# Altium PCB Detector.PcbDoc
Units mil, origin at the board's own origin, x right, y up, seen from the top; angles counter-clockwise.
Board outline 1400 x 900 mil, 2 copper layers (Top Layer, Bottom Layer), stack 62.209 mil thick; 35 components, 18 nets, 101 pads, 26 vias.
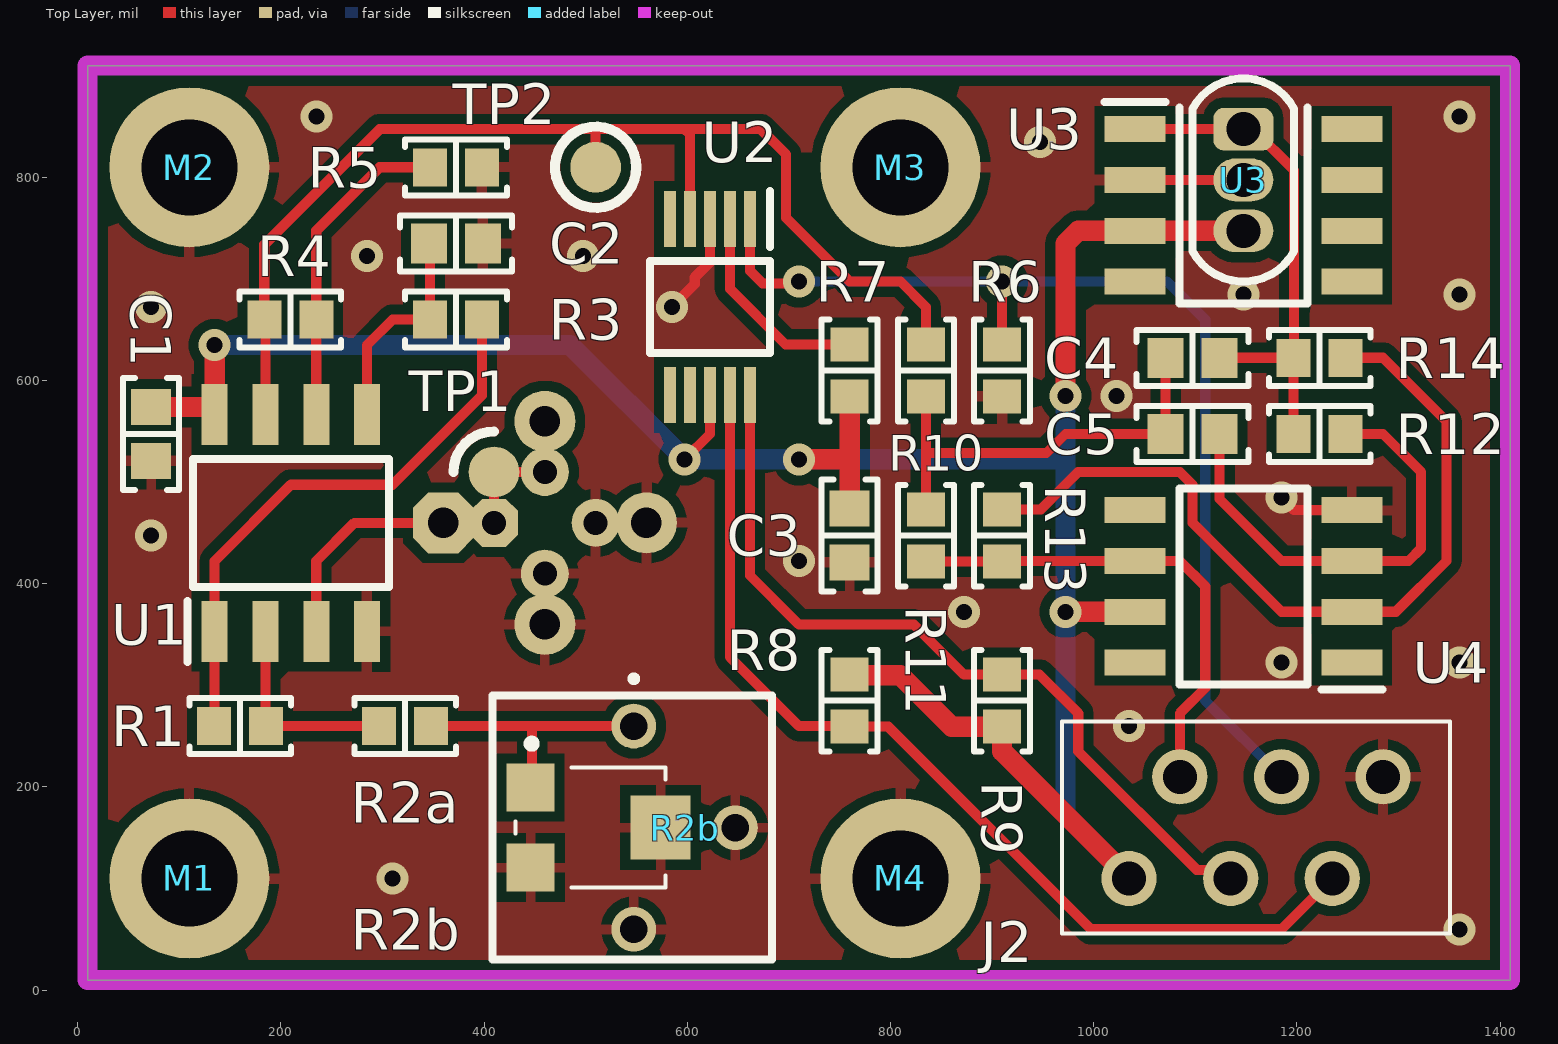
[diagram p0: Top Layer view]
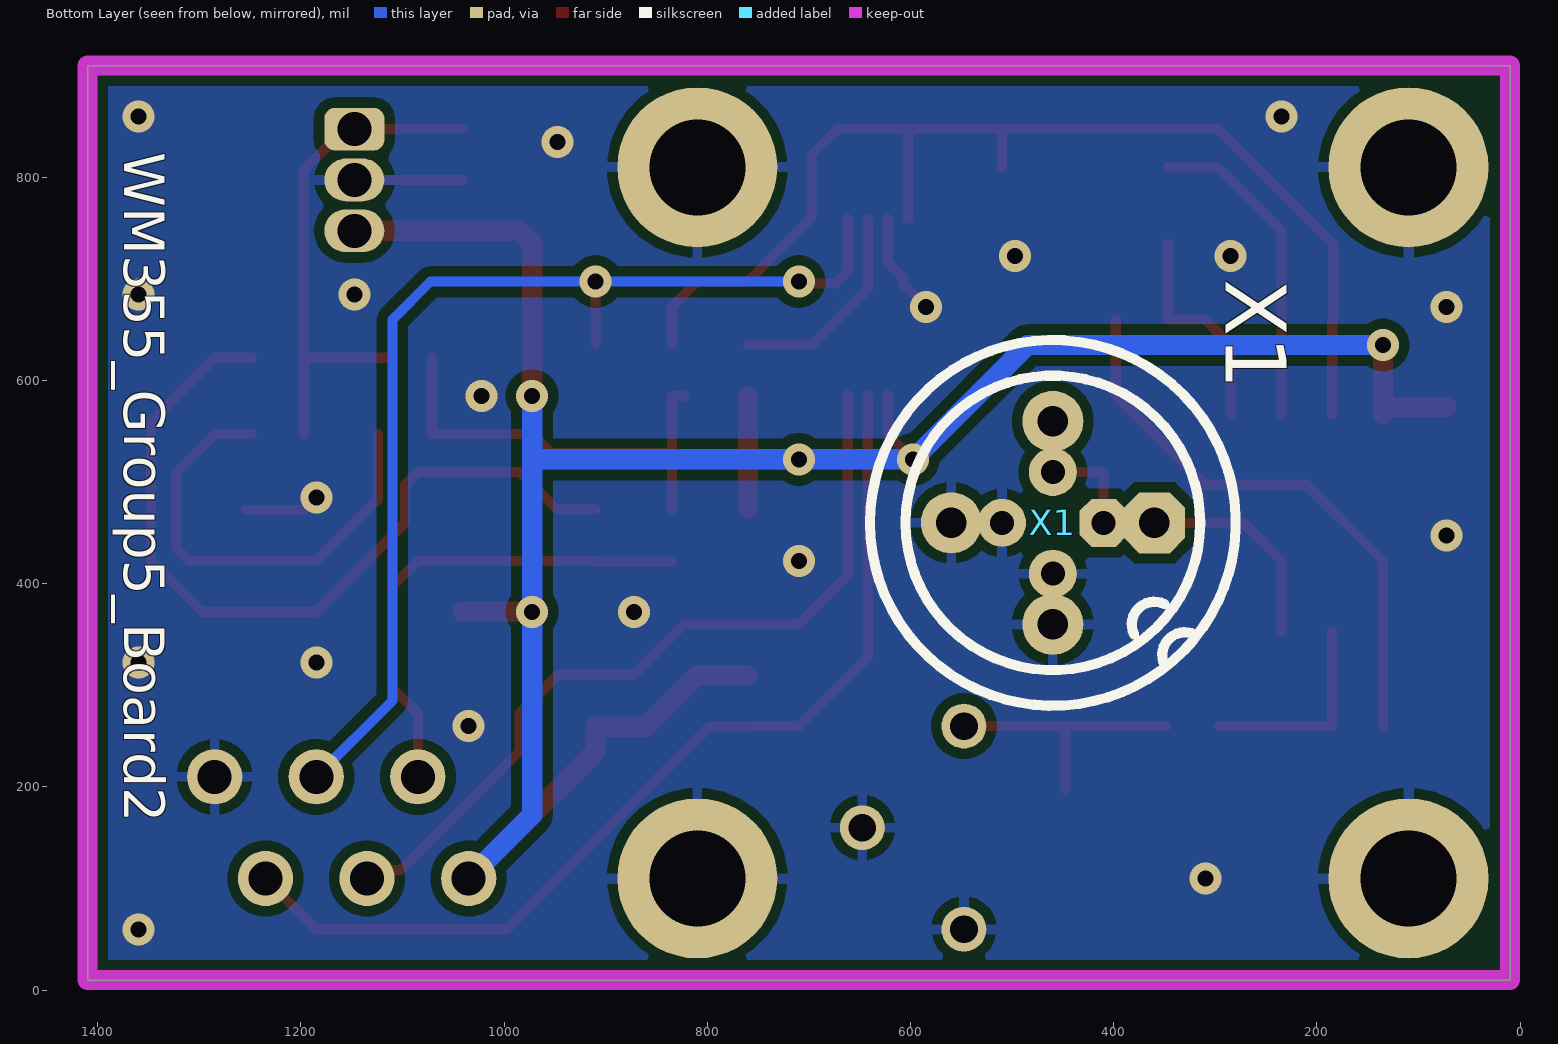
[diagram p1: Bottom Layer view, seen from below]
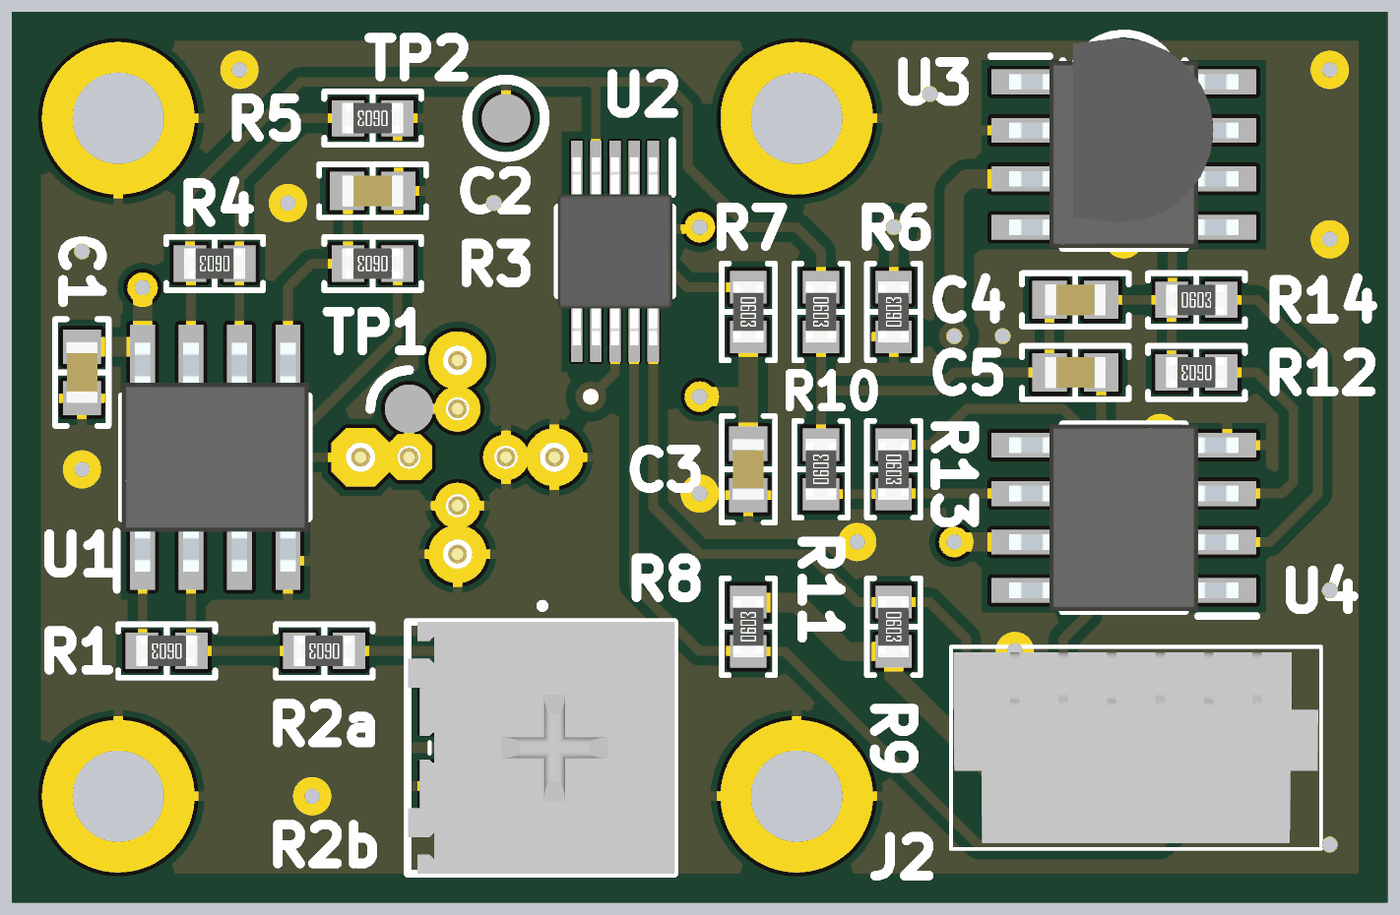
[diagram p2: 3D render of the assembled board from above, using the file's embedded part models]

## Layer stack, top to bottom
Top Solder: solder mask 0.4, Solder Resist, Dk 3.5
Top Layer: signal copper 1.4
Dielectric 1: dielectric 59.4094, FR-4, Dk 4.8
Bottom Layer: signal copper 1.4
Bottom Solder: solder mask 0.4, Solder Resist, Dk 3.5

## Board outline
1409.84,909.84 9.84,909.84 9.84,9.84 1409.84,9.84

## Design rules (kind name [scope] priority, off if disabled: settings)
Clearance [All] p1: gap=10 ignorepadtopadclearanceinfootprint=TRUE except(0: Arc-Hole Track-Hole SMDPad-Hole THPad-Hole Via-Hole Fill-Hole Poly-Hole Region-Hole Text-Hole; 5: Arc-Arc Arc-Track Arc-SMDPad Track-Track Track-SMDPad)
MinimumSolderMaskSliver [All] p1: minsoldermaskwidth=2.5
PolygonConnect [IsVia AND InNet('GND')] p1: connectstyle=Direct reliefconductorwidth=10 reliefentries=4 polygonreliefangle="90 Angle" airgapwidth=10
PolygonConnect PolygonConnect_1 [All] p2: connectstyle=Relief reliefconductorwidth=10 reliefentries=4 polygonreliefangle="90 Angle" airgapwidth=10
RoutingVias [All] p1: holewidth=28 width=50 viastyle="Through Hole" minholewidth=28 minwidth=50 maxholewidth=28 maxwidth=50
SilkToSilkClearance [All] p1: silktosilkclearance=2.5
SilkToSolderMaskClearance [IsPad] p1: minsilkscreentomaskgap=2.5 clearancetoexposedcopper=TRUE
SolderMaskExpansion [All] p1: expansion=4 istentingtop=FALSE
Width [All] p1: maxlimit=50 minlimit=10 preferedwidth=10 minimp=50.000000 maximp=50.000000 favimp=50.000000
27 further rules are at their usual default settings.

## Classes and differential pairs
component class Detector: C1 C2 C3 C4 C5 J2 M1 M2 M3 M4 R1 R2a R2b R3 R4 R5 R6 R7 R8 R9 R10 R11 R13 R14 TP1 TP2 U1 U2 U3 U4 X1

## Components (designator, comment, footprint, x,y, rotation, side; value= is the part's Value field where it differs from the comment)
C1 "100nF" "CAP 0603_1608" 72.34,547.34 r90 top
C2 "1µF" "CAP 0603_1608" 372.34,734.84 r180 top
C3 "1µF" "CAP 0603_1608" 759.84,447.34 r90 top
C4 "1µF" "CAP 0603_1608" 1097.34,622.34 r180 top
C5 "1µF" "CAP 0603_1608" 1097.34,547.34 r180 top
J2 "7-215460-6" 72154606 1159.84,159.84 r0 top
M1 "PTH" M2-PTH 109.84,109.84 r180 top
M2 "PTH" M2-PTH 109.84,809.84 r180 top
M3 "PTH" M2-PTH 809.84,809.84 r180 top
M4 "PTH" M2-PTH 809.84,109.84 r180 top
R1 "4.99kΩ" "RES 0603_1608" 159.84,259.84 r180 top
R2a "1kΩ" "RES 0603_1608" 322.34,259.84 r180 top
R2b "3362P-1-103LFTC33X-1-103E" 3362P_1 408.37,159.84 r270 top
R2b "TC33X-1-103E" TC33X2201E 509.84,159.84 r270 top
R3 "2.2kΩ" "RES 0603_1608" 372.34,659.84 r180 top
R4 "4.99kΩ" "RES 0603_1608" 209.25,659.84 r180 top
R5 "3kΩ" "RES 0603_1608" 372.34,809.84 r180 top
R6 "10kΩ" "RES 0603_1608" 909.84,609.84 r90 top
R7 "10kΩ" "RES 0603_1608" 759.84,609.84 r270 top
R8 "10kΩ" "RES 0603_1608" 759.84,284.84 r90 top
R9 "10kΩ" "RES 0603_1608" 909.84,284.84 r270 top
R10 "16kΩ" "RES 0603_1608" 834.84,609.84 r270 top
R11 "16kΩ" "RES 0603_1608" 834.84,447.34 r90 top
R12 "32.4kΩ" "RES 0603_1608" 1222.34,547.34 r180 top
R13 "4.99kΩ" "RES 0603_1608" 909.84,447.34 r270 top
R14 "10kΩ" "RES 0603_1608" 1222.34,622.34 r0 top
TP1 "Signal In" TP-SMD-50mil 409.84,509.84 r270 top
TP2 "Signal Out" TP-SMD-50mil 509.84,809.84 r270 top
U1 "AD8629ARZ" SOIC127P600X175-8N 209.84,459.84 r90 top
U2 "ADS1114BQDGSRQ1" SOP50P490X110-10N 622.34,672.34 r270 top
U3 "TLE2426CLP" TO-92 1147.34,847.34 r270 top
U3 "TLE2425CD" SOIC127P600X175-8N 1147.34,772.34 r0 top
U4 "AD8628ARZ" SOIC127P600X175-8N 1147.34,397.34 r180 top
X1 "TF-184" TF-184 459.84,459.84 r270 bottom
X1 "TF-54" TF-54 459.84,459.84 r270 bottom

## Footprints (in the part's own frame and the unit in brackets; to place one, negate y for a bottom-side part, rotate by r counter-clockwise, add the part's x,y. Pads: shape width x height; smd on the part's side, far side on the other; paste and mask are expansions set on the pad)
3362P_1 [mm]
  round 1.12 hole 0.69: 1(-2.54,3.53) 2(0,6.07) 3(2.54,3.53)
  silkscreen extent -3.78,0 3.3,6.99, body extent -3.3,0.01 3.3,7, height 4.65
72154606 [mm]
  round 1.381 hole 0.85: 1(-3.175,-1.27) 2(-1.905,1.27) 3(-0.635,-1.27) 4(0.635,1.27) 5(1.905,-1.27) 6(3.175,1.27)
  silkscreen extent -4.85,-2.65 4.85,2.65, body extent -4.77,-2.5 4.77,2.5, height 5.7
"CAP 0603_1608" [mm] "Chip Capacitor, 2-Leads, Body 1.60x0.80mm, IPC Medium Density"
  rect 0.9x1 smd: 1(-0.675,0) 2(0.675,0)
  silkscreen extent -1.4,-0.7 1.4,0.7, body extent -0.8,-0.41 0.8,0.41, height 0.82
M2-PTH [mm] "M2 Mounting Hole (Plated, Exposed Pad)"
  round 4 hole 2.4: 1(0,0)
"RES 0603_1608" [mm] "Chip Resistor, 2-Leads, Body 1.60x0.80mm, IPC Medium Density"
  rect 0.85x0.95 smd: 1(-0.65,0) 2(0.65,0)
  silkscreen extent -1.27,-0.7 1.27,0.7, body extent -0.8,-0.4 0.8,0.4, height 0.45
SOIC127P600X175-8N [mm]
  rect 1.525x0.65 smd: 1(-2.712,1.905) 2(-2.712,0.635) 3(-2.712,-0.635) 4(-2.712,-1.905) 5(2.712,-1.905) 6(2.712,-0.635) 7(2.712,0.635) 8(2.712,1.905)
  silkscreen extent -3.47,-2.45 1.6,2.58, body extent -3,-2.45 3,2.45, height 1.75
SOP50P490X110-10N [mm]
  rect 1.4x0.3 smd mask+0.05: 1(-2.2,1) 2(-2.2,0.5) 3(-2.2,0) 4(-2.2,-0.5) 5(-2.2,-1) 6(2.2,-1) 7(2.2,-0.5) 8(2.2,0) 9(2.2,0.5) 10(2.2,1)
  silkscreen extent -2.9,-1.5 1.15,1.5, body extent -2.46,-1.5 2.46,1.5, height 1.1
TC33X2201E [mm]
  rect 1.2x1.2 smd: 1(-1,-1.625) 3(1,-1.625)
  rect 1.6x1.5 smd: 2(0,1.625)
  silkscreen extent -2.2,-2 1.5,1.75, body extent -1.5,-1.9 1.5,1.9, height 1.2
TF-54 [mil] "TF-54 IC socket from Fischer Elektronik"
  oct 60x60 hole 30: 1(0,100)
  round 60 hole 30: 2(100,0) 3(0,-100) 4(-100,0)
  silkscreen extent -180,-180 180,180, body extent -203,-203 203,203, height 295
TF-184 [mm] "TF-184 IC socket from Fischer Elektronik"
  oct 1.2x1.2 hole 0.6: 1(0,1.27)
  round 1.2 hole 0.6: 2(1.27,0) 3(0,-1.27) 4(-1.27,0)
  silkscreen extent -3.68,-3.68 3.68,3.68, body extent -3.65,-3.65 3.65,3.65, height 7.5
TO-92 [mm]
  rrect50% 1.07x1.5 hole 0.85 mask+0.05: 1(0,0)
  oval 1.07x1.5 hole 0.85 mask+0.05: 2(1.27,0) 3(2.54,0)
  silkscreen extent -1.27,-1.27 3.81,1.27, body extent -1.14,-1.34 3.68,2.34, height 6.41
TP-SMD-50mil [mil] "50 mil diameter SMD test point"
  round 50 smd: 1(0,0)
  silkscreen extent -40,-40 0,0

## Part data
C1 C2 C3 C4 C5: library part Capacitor, "SMT Capacitor"
J2: "Micro-Match Connector Female 6-Way", Manufacturer_Name="TE Connectivity", Mouser Part Number=571-7-215460-6, Arrow Part Number=7-215460-6, Arrow Price/Stock=https://www.arrow.com/en/products/7-215460-6/te-connectivity, Datasheet Link=https://www.te.com/commerce/DocumentDelivery/DDEController?Action=srchrtrv&DocNm=4-1773457-1_050_Micro_MaTch&DocType=Data+Sheet&DocLang=English&PartCntxt=7-215460-6&DocFormat=pdf, Height=6mm, Manufacturer_Part_Number=7-215460-6, Mouser Price/Stock=https://www.mouser.co.uk/ProductDetail/TE-Connectivity/7-215460-6/?qs=XAKIUOoRPe4W4KMZv%2FpWzg%3D%3D, System=Connector
M1 M2 M3 M4: "Mounting Hole (Plated, Exposed Pad)"
R1 R2a R3 R4 R5 R6 R7 R8 R9 R10 R11 R12 R13 R14: library part Resistor, "SMT Resistor"
R2b: library part 3362P-1-103LF, "TH Trim Potentiometer"
R2b: "SMD Trim Potentiometer", Manufacturer_Name=Bourns, Mouser Part Number=652-TC33X-1-103E, Arrow Part Number=TC33X-1-103E, Arrow Price/Stock=https://www.arrow.com/en/products/tc33x-1-103e/bourns?region=nac, Datasheet Link=https://www.bourns.com/pdfs/TC33.pdf, Manufacturer_Part_Number=TC33X-1-103E, Mouser Price/Stock=https://www.mouser.co.uk/ProductDetail/Bourns/TC33X-1-103E?qs=4vvWAaIu%2Fq5rtw%252Bjip48Mw%3D%3D
TP1 TP2: library part "Test Point"
U1: "Zero-Drift Rail-to-Rail Op-Amp (Dual)", Manufacturer_Name="Analog Devices", Mouser Part Number=584-AD8629ARZ, Arrow Part Number=AD8629ARZ, Arrow Price/Stock=https://www.arrow.com/en/products/ad8629arz/analog-devices?region=nac, Datasheet Link=http://componentsearchengine.com/Datasheets/1/AD8629ARZ.pdf, Height=1.75mm, Manufacturer_Part_Number=AD8629ARZ, Mouser Price/Stock=https://www.mouser.co.uk/ProductDetail/Analog-Devices/AD8629ARZ?qs=%2FtpEQrCGXCz303nvavA3PQ%3D%3D
U2: "I2C 16-Bit ADC", Manufacturer_Name="Texas Instruments", Mouser Part Number=595-ADS1114BQDGSRQ1, Arrow Part Number=ADS1114BQDGSRQ1, Arrow Price/Stock=https://www.arrow.com/en/products/ads1114bqdgsrq1/texas-instruments?region=nac, Datasheet Link=http://www.ti.com/lit/gpn/ads1114-q1, Height=1.1mm, Manufacturer_Part_Number=ADS1114BQDGSRQ1, Mouser Price/Stock=https://www.mouser.co.uk/ProductDetail/Texas-Instruments/ADS1114BQDGSRQ1?qs=34RfhUjJmKcBhGeHOMIUqQ%3D%3D
U3: "Virtual Ground Reference"
U3: "Virtual Ground Reference", Manufacturer_Name="Texas Instruments", Mouser Part Number=595-TLE2425CD, Arrow Part Number=TLE2425CD, Arrow Price/Stock=https://www.arrow.com/en/products/tle2425cd/texas-instruments, Datasheet Link=http://www.ti.com/lit/ds/symlink/tle2425.pdf, Height=1.75mm, Manufacturer_Part_Number=TLE2425CD, Mouser Price/Stock=https://www.mouser.co.uk/ProductDetail/Texas-Instruments/TLE2425CD?qs=5BZzbFV4k2uGRCYCE5HEfQ%3D%3D
U4: "Zero-Drift Rail-to-Rail Op-Amp", Manufacturer_Name="Analog Devices", Mouser Part Number=584-AD8628ARZ, Arrow Part Number=AD8628ARZ, Arrow Price/Stock=https://www.arrow.com/en/products/ad8628arz/analog-devices?region=nac, Datasheet Link=https://www.mouser.in/datasheet/2/609/AD8628_8629_8630-1502219.pdf, Height=1.75mm, Manufacturer_Part_Number=AD8628ARZ, Mouser Price/Stock=https://www.mouser.co.uk/ProductDetail/Analog-Devices/AD8628ARZ?qs=%2FtpEQrCGXCxYn1FPBdRPTA%3D%3D
X1: "TF-184 Socket from Fischer Elektronik"
X1: "TF-54 Socket from Fischer Elektronik"

## Via types
v1: diameter 31.5, hole 15.75, Top Layer to Bottom Layer, 17 vias
v2: diameter 31.5, hole 15.75, Top Layer to Bottom Layer, tented top, 8 vias
v3: diameter 31.5, hole 15.75, Top Layer to Bottom Layer, tented bottom, 1 vias

## Nets (pads, with @x,y where several pads share a name; then routed paths per layer and width w, separated by ;. In a path a pad name is that pad's centre, name@x,y a point inside that pad or via, vN(x,y) a via of type N, cw(c..) or ccw(c..) an arc to the next point about the centre after c; other vN are vias at no path point)
ADDR: J2.4 R6.2 U2.1 | length 1063.5
  Top Layer w10: U2.1 661.71,707.97 674.09,695.59 708.09,695.59 v1(709.84,697.34) ; R6.2 v2(909.84,697.34)
  Bottom Layer w10: v1(709.84,697.34) v2(909.84,697.34) 1072.34,697.34 1109.84,659.84 1109.84,284.84 J2.4
AIN: R4.2 R10.1 TP2.1 U1.7 U2.4 | length 1139.9
  Top Layer w10: U1.7 184.84,658.66 R4.2 183.66,733.66 297.34,847.34 509.84,847.34 ; TP2.1 509.84,847.34 ; U2.4 602.66,842.03 597.34,847.34 ; R10.1 834.84,672.34 809.84,697.34 759.84,697.34 697.34,759.84 697.34,822.34 672.34,847.34 597.34,847.34 ; 509.84,847.34 597.34,847.34
BP_Out: J2.2 R11.1 R13.2 U4.6 | length 483.5
  Top Layer w10: R11.1 R13.2 910.43,422.34 U4.6 1084.84,422.34 1109.84,397.34 1109.84,297.34 1084.84,272.34 J2.2
GND: C1.1 C2.1 C3.1 J2.6 M1.1 M2.1 M3.1 M4.1 R2b.2 R2b.3 R5.1 R6.1 U1.4 U2.3 U3.2 U4.4 X1.2 X1.3 | length 333.4
  Top Layer w10: X1.2@459.84,359.84 X1.2@459.84,409.84 ; v1(584.84,672.34) 607.4,694.9 607.4,701.46 622.34,716.4 U2.3 ; U3.2@1040.57,797.34 U3.2@1147.34,797.34 ; v1(1184.84,484.84) 1197.34,472.34 U4.4
  other v1: 309.84,109.84 1034.84,259.84 1184.84,322.34 872.34,372.34 709.84,422.34 72.34,447.34 1147.34,684.84 1359.84,684.84 284.84,722.34 234.84,859.84 1359.84,859.84
  other v2: 1359.84,59.84 1359.84,322.34 1022.34,584.84 72.34,672.34 497.34,722.34 947.34,834.84
NetC2_2: C2.2 R3.2 U1.5 | length 215.9
  Top Layer w10: U1.5 284.84,634.84 309.84,659.84 R3.2 346.75,733.86 C2.2
NetC4_2: C4.2 C5.2 R10.2 R11.2 | length 442.8
  Top Layer w10: R10.2@822.34,584.84 834.25,584.84 R10.2 834.84,528.59 ; R11.2 834.84,528.59 ; C4.2 C5.2 972.34,547.34 953.59,528.59 834.84,528.59
NetC5_1: C5.1 R12.1 U4.3 | length 457.9
  Top Layer w10: C5.1 1123.92,483.27 1184.84,422.34 U4.3 1309.84,422.34 1322.34,434.84 1322.34,509.84 1284.84,547.34 R12.1
NetR1_1: R1.1 R2a.2 U1.2 | length 204.8
  Top Layer w10: U1.2 184.84,260.43 R1.1 R2a.2
NetR1_2: R1.2 R3.1 U1.1 | length 567.8
  Top Layer w10: R1.2 134.84,260.43 U1.1 134.84,422.34 209.84,497.34 309.84,497.34 397.93,585.43 R3.1
NetR2a_1: R2a.1 R2b.1 | length 261.9
  Top Layer w10: R2a.1 447.34,259.84 ; R2b.1@447.34,197.34 447.34,259.84 ; R2b.1@547.34,259.84 447.34,259.84
NetR4_1: R4.1 R5.2 U1.6 | length 318.5
  Top Layer w10: U1.6 R4.1 234.84,747.34 297.34,809.84 R5.2
NetR7_1: R7.1 U2.2 | length 209.3
  Top Layer w10: U2.2 642.03,690.16 696.75,635.43 R7.1
NetR13_1: R13.1 R14.2 U4.2 | length 815.2
  Top Layer w10: R13.1 947.93,472.93 984.84,509.84 1084.84,509.84 1097.34,497.34 1097.34,459.84 1184.84,372.34 U4.2 1297.34,372.34 1347.34,422.34 1347.34,559.84 1284.84,622.34 R14.2
NetTP1_1: TP1.1 U1.3 X1.1 X1.4 | length 309.8
  Top Layer w10: U1.3 234.84,422.34 272.34,459.84 X1.1@359.84,459.84 ; X1.1@409.84,459.84 TP1.1 X1.4@459.84,509.84
SCL: J2.3 R9.1 U2.10 | length 795.8
  Top Layer w10: U2.10 661.71,407.97 709.84,359.84 822.93,359.84 872.34,310.43 R9.1@909.25,310.43 ; R9.1 946.75,310.43 984.84,272.34 984.84,234.84 1101.35,118.33 1126.35,118.33 J2.3
SDA: J2.5 R8.1 U2.9 | length 982.5
  Top Layer w10: U2.9 642.03,327.66 709.84,259.84 759.25,259.84 R8.1 797.93,259.25 997.34,59.84 1184.84,59.84 J2.5
VCC: C1.2 C3.2 J2.1 R7.2 R8.2 R9.2 U1.8 U2.8 U3.3 U4.7 | length 2531.5
  Top Layer w10: v3(597.34,522.34) 622.34,547.34 U2.8 ; v1(709.84,522.34) v1@713.96,526.46 ; R8.2 R8.2@760.43,309.84
  Top Layer w20: C1.2 132.05,573.92 134.84,571.12 U1.8 134.84,573.92 v1(134.84,634.84) ; v1(709.84,522.34) 759.84,522.34 ; C3.2 759.84,522.34 ; R7.2 759.84,522.34 ; R8.2@760.43,309.84 809.84,309.84 860.43,259.25 R9.2@909.25,259.25 ; R9.2 909.84,234.84 J2.1 ; v1(972.34,372.34) U4.7 ; v2(972.34,584.84) 972.34,734.84 984.84,747.34 1040.57,747.34 U3.3@1147.34,747.34
  Bottom Layer w20: v1(134.84,634.84) 484.84,634.84 v3(597.34,522.34) v1(709.84,522.34) 972.34,522.34 ; v2(972.34,584.84) 972.34,522.34 ; J2.1 972.34,172.34 v1(972.34,372.34) 972.34,522.34
VirtGnd: C4.1 R12.2 R14.1 U3.1 | length 518.6
  Top Layer w10: U3.1@1040.57,847.34 1147.34,847.34 1156.81,847.34 1197.34,806.81 1197.34,622.93 R14.1 ; C4.1@1111.42,622.34 R14.1 ; R12.2 R14.1
pads on no net: U2.5 U2.6 U2.7 U3.4 U3.5 U3.6 U3.7 U3.8 U4.1 U4.5 U4.8

## Polygon pours and split planes (outlines as drawn)
GND on Top Layer "GND_L01_P000" (solid, pour order 0): 1397.34,22.34 22.34,22.34 22.34,897.34 1397.34,897.34
GND on Bottom Layer "GND_L02_P001" (solid, pour order 1): 1397.34,22.34 22.34,22.34 22.34,897.34 1397.34,897.34

## Keep-outs
Keep-Out Layer:
  the board outline again, w19.68

## Silkscreen, mask and mechanical layers (free items; w line width, h text height)
Bottom Overlay:
  text "WM355_Group5_Board2" at 1374.01,824.84 h40 r90
Mechanical 16 (Mech16):
  the board outline again, w19.68